# EAGLE board Theremin (EAGLE 9.7.0)

Size 198.42 x 139.2 mm. Coordinates in mm from the lower left corner, seen from the top.
Outline: 0,0 198.42,0 198.42,139.2 0,139.2 0,0
Copper layers (1*16): Top 0.035mm / dielectric 1.5mm / Bottom 0.035mm
Design rules "default": minimum track width 6mil, minimum drill 0.35mm, track to track 6mil, track to pad 6mil, pad to pad 6mil, via to via 6mil, smd to smd 6mil, copper to edge 40mil, drill to drill 6mil, minimum pad ring 10mil, minimum via ring 8mil, stop-mask expansion 4mil, vias tented up to drill 0mil, thermal gap 10mil

## Footprints (pad centres in the part's own frame; a part is rotated, then mirrored left to right if it is on the bottom)
HC-SR04 = drill 1.016 long: 1 -3.81,0; 2 -1.27,0; 3 1.27,0; 4 3.81,0
PIEZO = drill 1 pad 1.6: 1 -3.5,0; 2 3.5,0
RESAD1016W63L850D250B = drill 0.83 pad 1.43: 1 -5.08,0; 2 5.08,0
SWITCH-SPDT-PTH-8.5X3.7MM = drill 1.016 pad 1.88: 1 -2.54,0; 2 0,0; 3 2.54,0
TO92 = drill 0.813 octagon: 1 -1.27,0; 2 0,1.905; 3 1.27,0
ARDUINO-UNO-R3-SHIELD = drill 1.016 pad 1.88: 3.3V 24.13,-2.54; 5V 24.13,0; A0 24.13,12.7; A1 24.13,15.24; A2 24.13,17.78; A3 24.13,20.32; A4 24.13,22.86; A5 24.13,25.4; AREF -24.13,-13.97; D2 -24.13,20.32; D3 -24.13,17.78; D4 -24.13,15.24; D5 -24.13,12.7; D6 -24.13,10.16; D7 -24.13,7.62; D8 -24.13,3.81; D9 -24.13,1.27; D10 -24.13,-1.27; D11 -24.13,-3.81; D12 -24.13,-6.35; D13 -24.13,-8.89; GND@0 24.13,2.54; GND@1 24.13,5.08; GND@2 -24.13,-11.43; IOREF 24.13,-7.62; NC 24.13,-10.16; RES 24.13,-5.08; RX -24.13,25.4; SCL -24.13,-19.05; SDA -24.13,-16.51; TX -24.13,22.86; VIN 24.13,7.62
LCD-I2C = drill 1.016 long: 1 -19.05,-5.08; 2 -19.05,-7.62; 3 -19.05,-10.16; 4 -19.05,-12.7

## Placement (x,y rotation side)
DIST1  DISTANCE-SENSOR-4PINHC-SR04  [HC-SR04]  93.49,7.62 180 top
DIST2  DISTANCE-SENSOR-4PINHC-SR04  [HC-SR04]  172.38,9.07 180 top
PIEZO1  PIEZO  [PIEZO]  105.68,125.62 0 top
R1  1k  [RESAD1016W63L850D250B]  119.65,120.54 180 top
S1  TOGGLE  [SWITCH-SPDT-PTH-8.5X3.7MM]  101.87,115.46 0 top
T2  NPN  [TO92]  114.57,115.46 0 top
U1  ARDUINO-UNO-R3-SHIELD  [ARDUINO-UNO-R3-SHIELD]  105.48,59.91 270 top
U2  LCD-16X2-I2CSUNFOUNDER-IIC  [LCD-I2C]  30.73,129.6 0 top

## Library data of the parts
DIST1 DIST2 PIEZO1 R1 S1 U1 U2 = Tinkercad
T2 = Tinkercad; CATEGORY: Transistor; SUB-CATEGORY: BJT; TYPE: NPN

## Nets
PIEZO1_2: PIEZO1.2 T2.1
S1_O: PIEZO1.1 S1.1
T2_B: R1.2 T2.2
U1_5V: DIST1.1 DIST2.1 U1.5V U2.2
U1_A0: DIST1.3 U1.A0
U1_A1: DIST1.2 U1.A1
U1_A2: DIST2.3 U1.A2
U1_A3: DIST2.2 U1.A3
U1_A4: U1.A4 U2.3
U1_A5: U1.A5 U2.4
U1_D3: S1.2 U1.D3
U1_D6: R1.1 U1.D6
U1_GND: DIST1.4 DIST2.4 T2.3 U1.GND@0 U1.GND@1 U1.GND@2 U2.1

## Tracks (layer width: path | path; a pad name or v marks a point on that pad's centre or on a via)
PIEZO1_2  (1 unrouted)
S1_O  (1 unrouted)
T2_B  (1 unrouted)
U1_5V  (3 unrouted)
U1_A0  (1 unrouted)
U1_A1  (1 unrouted)
U1_A2  (1 unrouted)
U1_A3  (1 unrouted)
U1_A4  (1 unrouted)
U1_A5  (1 unrouted)
U1_D3  (1 unrouted)
U1_D6  (1 unrouted)
U1_GND  (6 unrouted)